# Altium PCB CH569W-R0-1v0.PcbDoc (part 4 of 4)
Units mil, origin at the board's own origin, x right, y up, seen from the top; angles counter-clockwise.
Board outline 3674 x 3156.46 mil, 4 copper layers (Top Layer, Mid-Layer 1, Mid-Layer 2, Bottom Layer); 78 components, 99 nets, 392 pads, 683 vias.
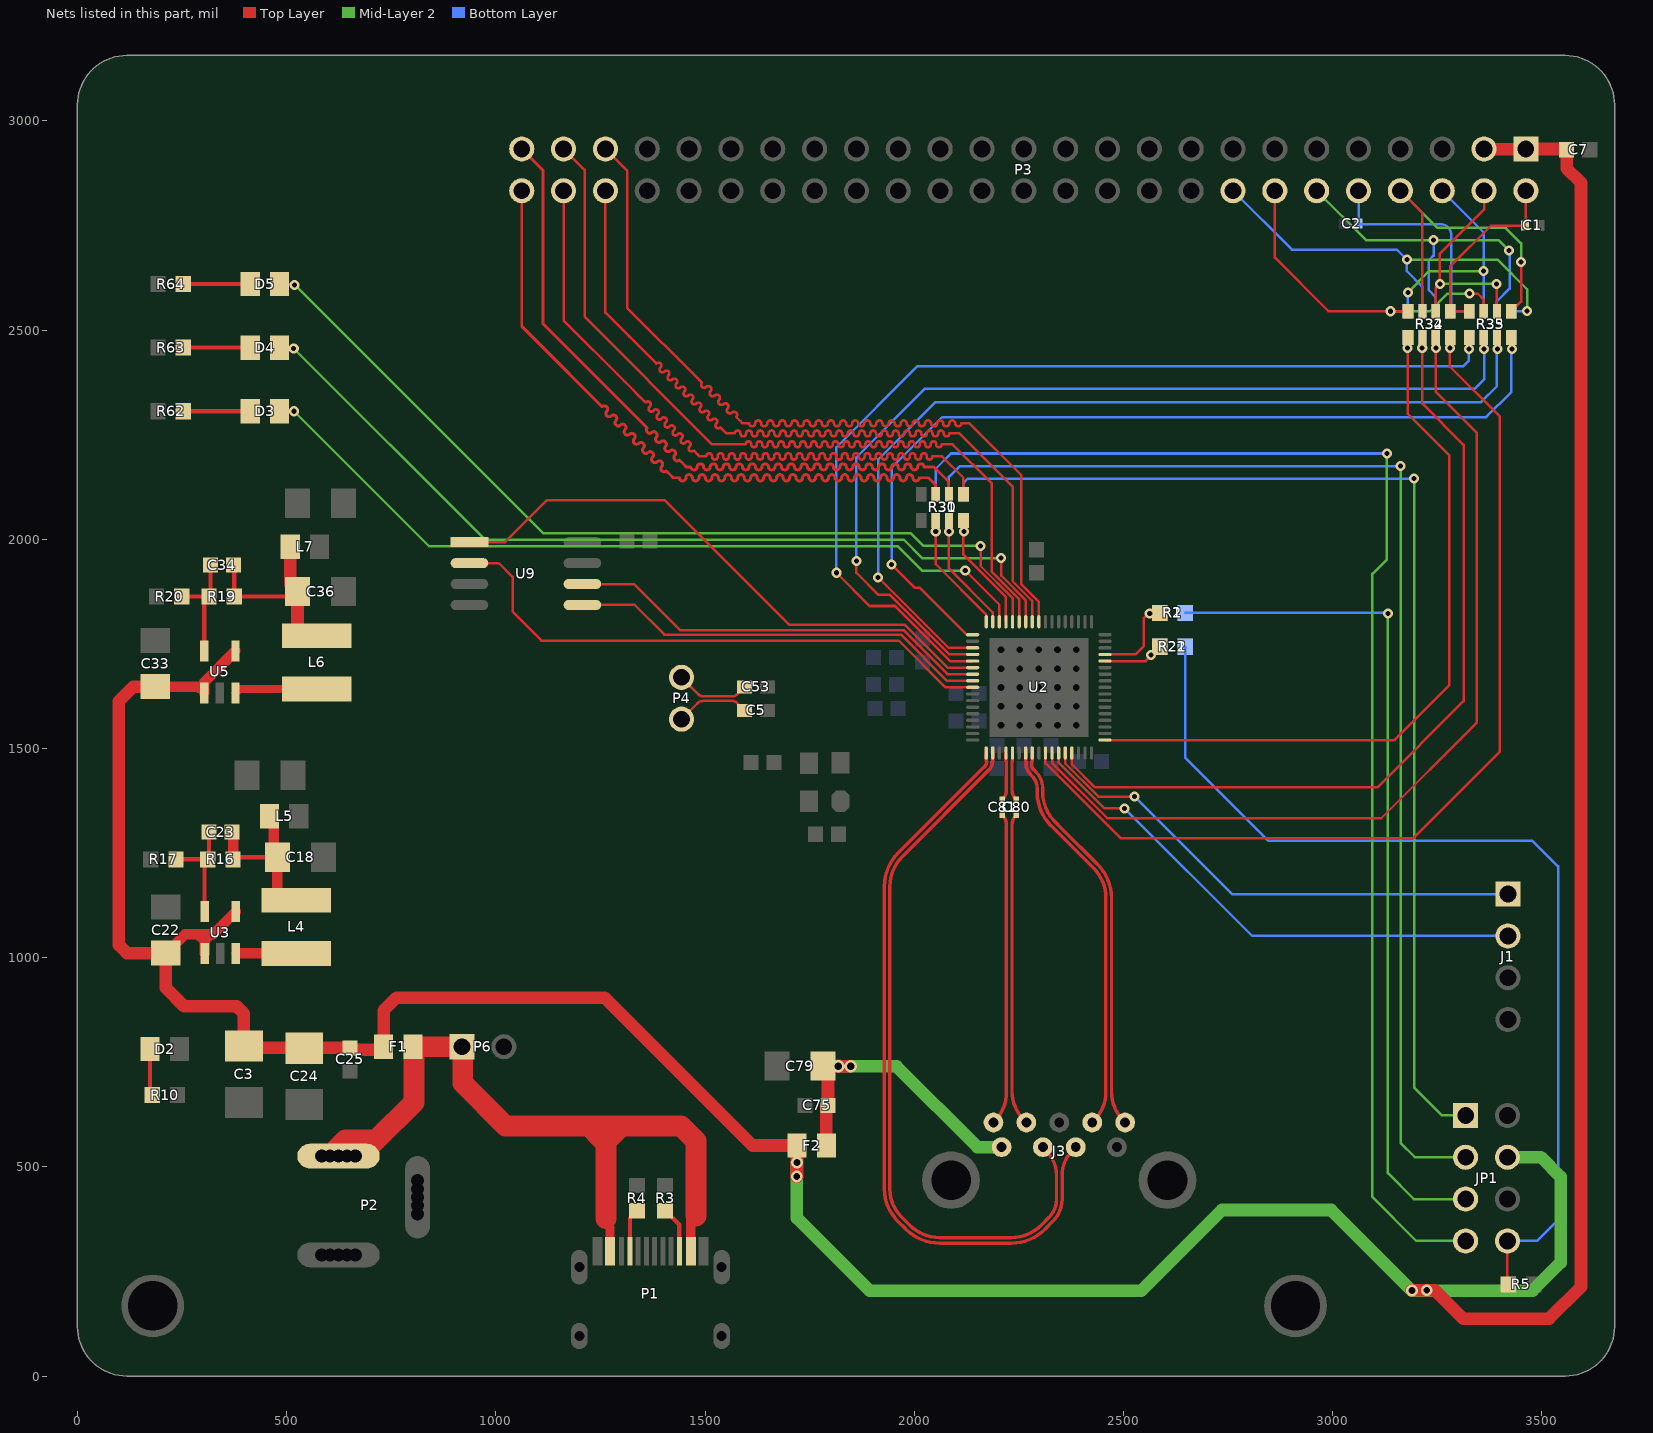
[diagram p6: the nets of this part, all layers, seen from the top]

## Via types
v1: diameter 17.72, hole 7.87, Top Layer to Bottom Layer, tented both sides, 350 vias
v2: diameter 28, hole 15, Top Layer to Bottom Layer, tented both sides, 141 vias
v3: diameter 28, hole 16, Top Layer to Bottom Layer, tented both sides, 104 vias
v4: diameter 24, hole 12, Top Layer to Bottom Layer, tented both sides, 85 vias
v5: diameter 30, hole 18, Top Layer to Bottom Layer, tented both sides, 3 vias

## Nets (pads, with @x,y where several pads share a name; then routed paths per layer and width w, separated by ;. In a path a pad name is that pad's centre, name@x,y a point inside that pad or via, vN(x,y) a via of type N, cw(c..) or ccw(c..) an arc to the next point about the centre after c; other vN are vias at no path point) (continued)
HD26: P3.45 U2.43 | length 2220.5
  Top Layer w6: P3.45@1262,2933 1314,2881 1314,2553 1486.5,2380.5 1492.6,2374.4 ccw(c1497.55,2369.45) 1492.6,2364.5 1492.95,2364.15 ccw(c1497.9,2369.1) 1502.85,2364.15 cw(c1507.8,2359.2) 1512.75,2364.15 1513.1,2363.8 cw(c1508.15,2358.85) 1513.1,2353.9 ccw(c1518.05,2348.95) 1513.1,2344 1513.46,2343.64 ccw(c1518.41,2348.59) 1523.36,2343.64 cw(c1528.3,2338.7) 1533.25,2343.64 1533.61,2343.29 cw(c1528.66,2338.34) 1533.61,2333.39 ccw(c1538.56,2328.44) 1533.61,2323.49 1533.96,2323.14 ccw(c1538.91,2328.09) 1543.86,2323.14 cw(c1548.81,2318.19) 1553.76,2323.14 1554.11,2322.79 cw(c1549.16,2317.84) 1554.11,2312.89 ccw(c1559.06,2307.94) 1554.11,2302.99 1554.47,2302.63 ccw(c1559.42,2307.58) 1564.37,2302.63 cw(c1569.32,2297.68) 1574.27,2302.63 1574.62,2302.28 cw(c1569.67,2297.33) 1574.62,2292.38 1584.87,2282.13 1590,2277 1590.75,2277 1605.25,2277 ccw(c1612.25,2277) 1612.25,2270 1612.75,2270 ccw(c1612.75,2277) 1619.75,2277 cw(c1626.75,2277) 1626.75,2284 1627.25,2284 cw(c1627.25,2277) 1634.25,2277 ccw(c1641.25,2277) 1641.25,2270 1641.75,2270 ccw(c1641.75,2277) 1648.75,2277 cw(c1655.75,2277) 1655.75,2284 1656.25,2284 cw(c1656.25,2277) 1663.25,2277 ccw(c1670.25,2277) 1670.25,2270 1670.75,2270 ccw(c1670.75,2277) 1677.75,2277 cw(c1684.75,2277) 1684.75,2284 1685.25,2284 cw(c1685.25,2277) 1692.25,2277 ccw(c1699.25,2277) 1699.25,2270 1699.75,2270 ccw(c1699.75,2277) 1706.75,2277 cw(c1713.75,2277) 1713.75,2284 1714.25,2284 cw(c1714.25,2277) 1721.25,2277 ccw(c1728.25,2277) 1728.25,2270 1728.75,2270 ccw(c1728.75,2277) 1735.75,2277 cw(c1742.75,2277) 1742.75,2284 1743.25,2284 cw(c1743.25,2277) 1750.25,2277 ccw(c1757.25,2277) 1757.25,2270 1757.75,2270 ccw(c1757.75,2277) 1764.75,2277 cw(c1771.75,2277) 1771.75,2284 1772.25,2284 cw(c1772.25,2277) 1779.25,2277 ccw(c1786.25,2277) 1786.25,2270 1786.75,2270 ccw(c1786.75,2277) 1793.75,2277 cw(c1800.75,2277) 1800.75,2284 1801.25,2284 cw(c1801.25,2277) 1808.25,2277 ccw(c1815.25,2277) 1815.25,2270 1815.75,2270 ccw(c1815.75,2277) 1822.75,2277 cw(c1829.75,2277) 1829.75,2284 1830.25,2284 cw(c1830.25,2277) 1837.25,2277 ccw(c1844.25,2277) 1844.25,2270 1844.75,2270 ccw(c1844.75,2277) 1851.75,2277 cw(c1858.75,2277) 1858.75,2284 1859.25,2284 cw(c1859.25,2277) 1866.25,2277 ccw(c1873.25,2277) 1873.25,2270 1873.75,2270 ccw(c1873.75,2277) 1880.75,2277 cw(c1887.75,2277) 1887.75,2284 1888.25,2284 cw(c1888.25,2277) 1895.25,2277 ccw(c1902.25,2277) 1902.25,2270 1902.75,2270 ccw(c1902.75,2277) 1909.75,2277 cw(c1916.75,2277) 1916.75,2284 1917.25,2284 cw(c1917.25,2277) 1924.25,2277 ccw(c1931.25,2277) 1931.25,2270 1931.75,2270 ccw(c1931.75,2277) 1938.75,2277 cw(c1945.75,2277) 1945.75,2284 1946.25,2284 cw(c1946.25,2277) 1953.25,2277 ccw(c1960.25,2277) 1960.25,2270 1960.75,2270 ccw(c1960.75,2277) 1967.75,2277 cw(c1974.75,2277) 1974.75,2284 1975.25,2284 cw(c1975.25,2277) 1982.25,2277 ccw(c1989.25,2277) 1989.25,2270 1989.75,2270 ccw(c1989.75,2277) 1996.75,2277 cw(c2003.75,2277) 2003.75,2284 2004.25,2284 cw(c2004.25,2277) 2011.25,2277 ccw(c2018.25,2277) 2018.25,2270 2018.75,2270 ccw(c2018.75,2277) 2025.75,2277 cw(c2032.75,2277) 2032.75,2284 2033.25,2284 cw(c2033.25,2277) 2040.25,2277 ccw(c2047.25,2277) 2047.25,2270 2047.75,2270 ccw(c2047.75,2277) 2054.75,2277 cw(c2061.75,2277) 2061.75,2284 2062.25,2284 cw(c2062.25,2277) 2069.25,2277 ccw(c2076.25,2277) 2076.25,2270 2076.75,2270 ccw(c2076.75,2277) 2083.75,2277 cw(c2090.75,2277) 2090.75,2284 2091.25,2284 cw(c2091.25,2277) 2098.25,2277 ccw(c2105.25,2277) 2105.25,2270 2105.75,2270 ccw(c2105.75,2277) 2112.75,2277 2120,2277 2132,2277 2256,2153 2256,1892.18 2298,1850.18 U2.43@2298,1802.78
HD27: P3.46 U2.44 | length 2222.2
  Top Layer w6: P3.46@1262,2833 1262,2542 1319.5,2484.5 1383.95,2420.05 1384.12,2420.23 cw(c1388.9,2415.46) 1393.67,2420.23 cw(c1388.9,2415.46) 1393.67,2410.68 1393.49,2410.51 1393.32,2410.33 ccw(c1398.09,2405.56) 1393.32,2400.79 ccw(c1398.09,2405.56) 1402.86,2400.79 1403.04,2400.96 1403.21,2401.14 cw(c1407.99,2396.37) 1412.76,2401.14 cw(c1407.99,2396.37) 1412.76,2391.59 1412.58,2391.42 1412.41,2391.24 ccw(c1417.18,2386.47) 1412.41,2381.69 ccw(c1417.18,2386.47) 1421.95,2381.69 1422.13,2381.87 1422.31,2382.05 cw(c1427.08,2377.27) 1431.85,2382.05 cw(c1427.08,2377.27) 1431.85,2372.5 1431.68,2372.32 1431.5,2372.15 ccw(c1436.27,2367.37) 1431.5,2362.6 ccw(c1436.27,2367.37) 1441.04,2362.6 1441.22,2362.78 1441.4,2362.96 cw(c1446.17,2358.18) 1450.94,2362.96 cw(c1446.17,2358.18) 1450.94,2353.41 1450.77,2353.23 1450.59,2353.06 ccw(c1455.36,2348.28) 1450.59,2343.51 ccw(c1455.36,2348.28) 1460.14,2343.51 1460.31,2343.69 1460.49,2343.86 cw(c1465.26,2339.09) 1470.04,2343.86 cw(c1465.26,2339.09) 1470.04,2334.32 1469.86,2334.14 1469.68,2333.96 ccw(c1474.46,2329.19) 1469.68,2324.42 ccw(c1474.46,2329.19) 1479.23,2324.42 1479.41,2324.59 1479.58,2324.77 cw(c1484.36,2320) 1489.13,2324.77 cw(c1484.36,2320) 1489.13,2315.23 1488.95,2315.05 1488.77,2314.87 ccw(c1493.55,2310.1) 1488.77,2305.33 ccw(c1493.55,2310.1) 1498.32,2305.33 1498.5,2305.5 1498.67,2305.68 cw(c1503.45,2300.91) 1508.22,2305.68 cw(c1503.45,2300.91) 1508.22,2296.13 1508.04,2295.96 1507.87,2295.78 ccw(c1512.64,2291.01) 1507.87,2286.23 ccw(c1512.64,2291.01) 1517.41,2286.23 1517.59,2286.41 1517.77,2286.59 cw(c1522.54,2281.81) 1527.31,2286.59 cw(c1522.54,2281.81) 1527.31,2277.04 1527.14,2276.86 1526.96,2276.69 ccw(c1531.73,2271.92) 1526.96,2267.14 ccw(c1531.73,2271.92) 1536.5,2267.14 1536.68,2267.32 1546.23,2257.77 1551,2253 1557.75,2253 1571.25,2253 1571.25,2253.25 cw(c1578,2253.25) 1578,2260 cw(c1578,2253.25) 1584.75,2253.25 1584.75,2253 1584.75,2252.75 ccw(c1591.5,2252.75) 1591.5,2246 ccw(c1591.5,2252.75) 1598.25,2252.75 1598.25,2253 1598.25,2253.25 cw(c1605,2253.25) 1605,2260 cw(c1605,2253.25) 1611.75,2253.25 1611.75,2253 1611.75,2252.75 ccw(c1618.5,2252.75) 1618.5,2246 ccw(c1618.5,2252.75) 1625.25,2252.75 1625.25,2253 1625.25,2253.25 cw(c1632,2253.25) 1632,2260 cw(c1632,2253.25) 1638.75,2253.25 1638.75,2253 1638.75,2252.75 ccw(c1645.5,2252.75) 1645.5,2246 ccw(c1645.5,2252.75) 1652.25,2252.75 1652.25,2253 1652.25,2253.25 cw(c1659,2253.25) 1659,2260 cw(c1659,2253.25) 1665.75,2253.25 1665.75,2253 1665.75,2252.75 ccw(c1672.5,2252.75) 1672.5,2246 ccw(c1672.5,2252.75) 1679.25,2252.75 1679.25,2253 1679.25,2253.25 cw(c1686,2253.25) 1686,2260 cw(c1686,2253.25) 1692.75,2253.25 1692.75,2253 1692.75,2252.75 ccw(c1699.5,2252.75) 1699.5,2246 ccw(c1699.5,2252.75) 1706.25,2252.75 1706.25,2253 1706.25,2253.25 cw(c1713,2253.25) 1713,2260 cw(c1713,2253.25) 1719.75,2253.25 1719.75,2253 1719.75,2252.75 ccw(c1726.5,2252.75) 1726.5,2246 ccw(c1726.5,2252.75) 1733.25,2252.75 1733.25,2253 1733.25,2253.25 cw(c1740,2253.25) 1740,2260 cw(c1740,2253.25) 1746.75,2253.25 1746.75,2253 1746.75,2252.75 ccw(c1753.5,2252.75) 1753.5,2246 ccw(c1753.5,2252.75) 1760.25,2252.75 1760.25,2253 1760.25,2253.25 cw(c1767,2253.25) 1767,2260 cw(c1767,2253.25) 1773.75,2253.25 1773.75,2253 1773.75,2252.75 ccw(c1780.5,2252.75) 1780.5,2246 ccw(c1780.5,2252.75) 1787.25,2252.75 1787.25,2253 1787.25,2253.25 cw(c1794,2253.25) 1794,2260 cw(c1794,2253.25) 1800.75,2253.25 1800.75,2253 1800.75,2252.75 ccw(c1807.5,2252.75) 1807.5,2246 ccw(c1807.5,2252.75) 1814.25,2252.75 1814.25,2253 1814.25,2253.25 cw(c1821,2253.25) 1821,2260 cw(c1821,2253.25) 1827.75,2253.25 1827.75,2253 1827.75,2252.75 ccw(c1834.5,2252.75) 1834.5,2246 ccw(c1834.5,2252.75) 1841.25,2252.75 1841.25,2253 1841.25,2253.25 cw(c1848,2253.25) 1848,2260 cw(c1848,2253.25) 1854.75,2253.25 1854.75,2253 1854.75,2252.75 ccw(c1861.5,2252.75) 1861.5,2246 ccw(c1861.5,2252.75) 1868.25,2252.75 1868.25,2253 1868.25,2253.25 cw(c1875,2253.25) 1875,2260 cw(c1875,2253.25) 1881.75,2253.25 1881.75,2253 1881.75,2252.75 ccw(c1888.5,2252.75) 1888.5,2246 ccw(c1888.5,2252.75) 1895.25,2252.75 1895.25,2253 1895.25,2253.25 cw(c1902,2253.25) 1902,2260 cw(c1902,2253.25) 1908.75,2253.25 1908.75,2253 1908.75,2252.75 ccw(c1915.5,2252.75) 1915.5,2246 ccw(c1915.5,2252.75) 1922.25,2252.75 1922.25,2253 1922.25,2253.25 cw(c1929,2253.25) 1929,2260 cw(c1929,2253.25) 1935.75,2253.25 1935.75,2253 1935.75,2252.75 ccw(c1942.5,2252.75) 1942.5,2246 ccw(c1942.5,2252.75) 1949.25,2252.75 1949.25,2253 1949.25,2253.25 cw(c1956,2253.25) 1956,2260 cw(c1956,2253.25) 1962.75,2253.25 1962.75,2253 1962.75,2252.75 ccw(c1969.5,2252.75) 1969.5,2246 ccw(c1969.5,2252.75) 1976.25,2252.75 1976.25,2253 1976.25,2253.25 cw(c1983,2253.25) 1983,2260 cw(c1983,2253.25) 1989.75,2253.25 1989.75,2253 1989.75,2252.75 ccw(c1996.5,2252.75) 1996.5,2246 ccw(c1996.5,2252.75) 2003.25,2252.75 2003.25,2253 2003.25,2253.25 cw(c2010,2253.25) 2010,2260 cw(c2010,2253.25) 2016.75,2253.25 2016.75,2253 2016.75,2252.75 ccw(c2023.5,2252.75) 2023.5,2246 ccw(c2023.5,2252.75) 2030.25,2252.75 2030.25,2253 2030.25,2253.25 cw(c2037,2253.25) 2037,2260 cw(c2037,2253.25) 2043.75,2253.25 2043.75,2253 2043.75,2252.75 ccw(c2050.5,2252.75) 2050.5,2246 ccw(c2050.5,2252.75) 2057.25,2252.75 2057.25,2253 2057.25,2253.25 cw(c2064,2253.25) 2064,2260 cw(c2064,2253.25) 2070.75,2253.25 2070.75,2253 2070.75,2252.75 ccw(c2077.5,2252.75) 2077.5,2246 ccw(c2077.5,2252.75) 2084.25,2252.75 2084.25,2253 2091,2253 2108,2253 2235,2126 2235,1899.74 2282.25,1852.49 U2.44@2282.25,1802.78
HD28: P3.47 U2.46 | length 2221.2
  Top Layer w6: P3.47@1162,2933 1212,2883 1212,2532 1517,2227 1557,2227 1597.5,2227 1597.5,2227.5 cw(c1604,2227.5) 1604,2234 cw(c1604,2227.5) 1610.5,2227.5 1610.5,2227 1610.5,2226.5 ccw(c1617,2226.5) 1617,2220 ccw(c1617,2226.5) 1623.5,2226.5 1623.5,2227 1623.5,2227.5 cw(c1630,2227.5) 1630,2234 cw(c1630,2227.5) 1636.5,2227.5 1636.5,2227 1636.5,2226.5 ccw(c1643,2226.5) 1643,2220 ccw(c1643,2226.5) 1649.5,2226.5 1649.5,2227 1649.5,2227.5 cw(c1656,2227.5) 1656,2234 cw(c1656,2227.5) 1662.5,2227.5 1662.5,2227 1662.5,2226.5 ccw(c1669,2226.5) 1669,2220 ccw(c1669,2226.5) 1675.5,2226.5 1675.5,2227 1675.5,2227.5 cw(c1682,2227.5) 1682,2234 cw(c1682,2227.5) 1688.5,2227.5 1688.5,2227 1688.5,2226.5 ccw(c1695,2226.5) 1695,2220 ccw(c1695,2226.5) 1701.5,2226.5 1701.5,2227 1701.5,2227.5 cw(c1708,2227.5) 1708,2234 cw(c1708,2227.5) 1714.5,2227.5 1714.5,2227 1714.5,2226.5 ccw(c1721,2226.5) 1721,2220 ccw(c1721,2226.5) 1727.5,2226.5 1727.5,2227 1727.5,2227.5 cw(c1734,2227.5) 1734,2234 cw(c1734,2227.5) 1740.5,2227.5 1740.5,2227 1740.5,2226.5 ccw(c1747,2226.5) 1747,2220 ccw(c1747,2226.5) 1753.5,2226.5 1753.5,2227 1753.5,2227.5 cw(c1760,2227.5) 1760,2234 cw(c1760,2227.5) 1766.5,2227.5 1766.5,2227 1766.5,2226.5 ccw(c1773,2226.5) 1773,2220 ccw(c1773,2226.5) 1779.5,2226.5 1779.5,2227 1779.5,2227.5 cw(c1786,2227.5) 1786,2234 cw(c1786,2227.5) 1792.5,2227.5 1792.5,2227 1792.5,2226.5 ccw(c1799,2226.5) 1799,2220 ccw(c1799,2226.5) 1805.5,2226.5 1805.5,2227 1805.5,2227.5 cw(c1812,2227.5) 1812,2234 cw(c1812,2227.5) 1818.5,2227.5 1818.5,2227 1818.5,2226.5 ccw(c1825,2226.5) 1825,2220 ccw(c1825,2226.5) 1831.5,2226.5 1831.5,2227 1831.5,2227.5 cw(c1838,2227.5) 1838,2234 cw(c1838,2227.5) 1844.5,2227.5 1844.5,2227 1844.5,2226.5 ccw(c1851,2226.5) 1851,2220 ccw(c1851,2226.5) 1857.5,2226.5 1857.5,2227 1857.5,2227.5 cw(c1864,2227.5) 1864,2234 cw(c1864,2227.5) 1870.5,2227.5 1870.5,2227 1870.5,2226.5 ccw(c1877,2226.5) 1877,2220 ccw(c1877,2226.5) 1883.5,2226.5 1883.5,2227 1883.5,2227.5 cw(c1890,2227.5) 1890,2234 cw(c1890,2227.5) 1896.5,2227.5 1896.5,2227 1896.5,2226.5 ccw(c1903,2226.5) 1903,2220 ccw(c1903,2226.5) 1909.5,2226.5 1909.5,2227 1909.5,2227.5 cw(c1916,2227.5) 1916,2234 cw(c1916,2227.5) 1922.5,2227.5 1922.5,2227 1922.5,2226.5 ccw(c1929,2226.5) 1929,2220 ccw(c1929,2226.5) 1935.5,2226.5 1935.5,2227 1935.5,2227.5 cw(c1942,2227.5) 1942,2234 cw(c1942,2227.5) 1948.5,2227.5 1948.5,2227 1948.5,2226.5 ccw(c1955,2226.5) 1955,2220 ccw(c1955,2226.5) 1961.5,2226.5 1961.5,2227 1961.5,2227.5 cw(c1968,2227.5) 1968,2234 cw(c1968,2227.5) 1974.5,2227.5 1974.5,2227 1974.5,2226.5 ccw(c1981,2226.5) 1981,2220 ccw(c1981,2226.5) 1987.5,2226.5 1987.5,2227 1987.5,2227.5 cw(c1994,2227.5) 1994,2234 cw(c1994,2227.5) 2000.5,2227.5 2000.5,2227 2000.5,2226.5 ccw(c2007,2226.5) 2007,2220 ccw(c2007,2226.5) 2013.5,2226.5 2013.5,2227 2013.5,2227.5 cw(c2020,2227.5) 2020,2234 cw(c2020,2227.5) 2026.5,2227.5 2026.5,2227 2026.5,2226.5 ccw(c2033,2226.5) 2033,2220 ccw(c2033,2226.5) 2039.5,2226.5 2039.5,2227 2039.5,2227.5 cw(c2046,2227.5) 2046,2234 cw(c2046,2227.5) 2052.5,2227.5 2052.5,2227 2052.5,2226.5 ccw(c2059,2226.5) 2059,2220 ccw(c2059,2226.5) 2065.5,2226.5 2065.5,2227 2072,2227 2092,2227 2185,2134 2185,1922.87 2250.76,1857.11 U2.46@2250.76,1802.78
HD29: P3.48 R31.1 | length 1938.3
  Top Layer w6: P3.48@1162,2833 1162,2523 1307,2378 1357.6,2327.4 ccw(c1358.13,2327.93) 1358.66,2327.4 cw(c1363.43,2322.63) 1368.21,2327.4 cw(c1363.43,2322.63) 1368.21,2317.85 1367.68,2317.32 1367.15,2316.79 ccw(c1371.92,2312.02) 1367.15,2307.25 ccw(c1371.92,2312.02) 1376.69,2307.25 1377.22,2307.78 1377.75,2308.31 cw(c1382.53,2303.54) 1387.3,2308.31 cw(c1382.53,2303.54) 1387.3,2298.76 1386.77,2298.23 1386.24,2297.7 ccw(c1391.01,2292.93) 1386.24,2288.16 ccw(c1391.01,2292.93) 1395.78,2288.16 1396.31,2288.69 1396.84,2289.22 cw(c1401.62,2284.44) 1406.39,2289.22 cw(c1401.62,2284.44) 1406.39,2279.67 1405.86,2279.14 1405.33,2278.61 ccw(c1410.1,2273.84) 1405.33,2269.06 ccw(c1410.1,2273.84) 1414.88,2269.06 1415.41,2269.59 1415.94,2270.12 cw(c1420.71,2265.35) 1425.48,2270.12 cw(c1420.71,2265.35) 1425.48,2260.58 1424.95,2260.05 1424.42,2259.52 ccw(c1429.19,2254.75) 1424.42,2249.97 ccw(c1429.19,2254.75) 1433.97,2249.97 1434.5,2250.5 1435.03,2251.03 cw(c1439.8,2246.26) 1444.57,2251.03 cw(c1439.8,2246.26) 1444.57,2241.49 1444.04,2240.96 1443.51,2240.43 ccw(c1448.29,2235.65) 1443.51,2230.88 ccw(c1448.29,2235.65) 1453.06,2230.88 1453.59,2231.41 1454.12,2231.94 cw(c1458.89,2227.17) 1463.67,2231.94 cw(c1458.89,2227.17) 1463.67,2222.4 1463.14,2221.86 1462.6,2221.33 ccw(c1467.38,2216.56) 1462.6,2211.79 ccw(c1467.38,2216.56) 1472.15,2211.79 cw(c1472.68,2211.26) 1473.21,2211.79 1482.23,2202.77 1487,2198 1489.75,2198 1502.5,2198 ccw(c1502.5,2198.75) 1503.25,2198.75 cw(c1510,2198.75) 1510,2205.5 cw(c1510,2198.75) 1516.75,2198.75 1516.75,2198 1516.75,2197.25 ccw(c1523.5,2197.25) 1523.5,2190.5 ccw(c1523.5,2197.25) 1530.25,2197.25 1530.25,2198 1530.25,2198.75 cw(c1537,2198.75) 1537,2205.5 cw(c1537,2198.75) 1543.75,2198.75 1543.75,2198 1543.75,2197.25 ccw(c1550.5,2197.25) 1550.5,2190.5 ccw(c1550.5,2197.25) 1557.25,2197.25 1557.25,2198 1557.25,2198.75 cw(c1564,2198.75) 1564,2205.5 cw(c1564,2198.75) 1570.75,2198.75 1570.75,2198 1570.75,2197.25 ccw(c1577.5,2197.25) 1577.5,2190.5 ccw(c1577.5,2197.25) 1584.25,2197.25 1584.25,2198 1584.25,2198.75 cw(c1591,2198.75) 1591,2205.5 cw(c1591,2198.75) 1597.75,2198.75 1597.75,2198 1597.75,2197.25 ccw(c1604.5,2197.25) 1604.5,2190.5 ccw(c1604.5,2197.25) 1611.25,2197.25 1611.25,2198 1611.25,2198.75 cw(c1618,2198.75) 1618,2205.5 cw(c1618,2198.75) 1624.75,2198.75 1624.75,2198 1624.75,2197.25 ccw(c1631.5,2197.25) 1631.5,2190.5 ccw(c1631.5,2197.25) 1638.25,2197.25 1638.25,2198 1638.25,2198.75 cw(c1645,2198.75) 1645,2205.5 cw(c1645,2198.75) 1651.75,2198.75 1651.75,2198 1651.75,2197.25 ccw(c1658.5,2197.25) 1658.5,2190.5 ccw(c1658.5,2197.25) 1665.25,2197.25 1665.25,2198 1665.25,2198.75 cw(c1672,2198.75) 1672,2205.5 cw(c1672,2198.75) 1678.75,2198.75 1678.75,2198 1678.75,2197.25 ccw(c1685.5,2197.25) 1685.5,2190.5 ccw(c1685.5,2197.25) 1692.25,2197.25 1692.25,2198 1692.25,2198.75 cw(c1699,2198.75) 1699,2205.5 cw(c1699,2198.75) 1705.75,2198.75 1705.75,2198 1705.75,2197.25 ccw(c1712.5,2197.25) 1712.5,2190.5 ccw(c1712.5,2197.25) 1719.25,2197.25 1719.25,2198 1719.25,2198.75 cw(c1726,2198.75) 1726,2205.5 cw(c1726,2198.75) 1732.75,2198.75 1732.75,2198 1732.75,2197.25 ccw(c1739.5,2197.25) 1739.5,2190.5 ccw(c1739.5,2197.25) 1746.25,2197.25 1746.25,2198 1746.25,2198.75 cw(c1753,2198.75) 1753,2205.5 cw(c1753,2198.75) 1759.75,2198.75 1759.75,2198 1759.75,2197.25 ccw(c1766.5,2197.25) 1766.5,2190.5 ccw(c1766.5,2197.25) 1773.25,2197.25 1773.25,2198 1773.25,2198.75 cw(c1780,2198.75) 1780,2205.5 cw(c1780,2198.75) 1786.75,2198.75 1786.75,2198 1786.75,2197.25 ccw(c1793.5,2197.25) 1793.5,2190.5 ccw(c1793.5,2197.25) 1800.25,2197.25 1800.25,2198 1800.25,2198.75 cw(c1807,2198.75) 1807,2205.5 cw(c1807,2198.75) 1813.75,2198.75 1813.75,2198 1813.75,2197.25 ccw(c1820.5,2197.25) 1820.5,2190.5 ccw(c1820.5,2197.25) 1827.25,2197.25 1827.25,2198 1827.25,2198.75 cw(c1834,2198.75) 1834,2205.5 cw(c1834,2198.75) 1840.75,2198.75 1840.75,2198 1840.75,2197.25 ccw(c1847.5,2197.25) 1847.5,2190.5 ccw(c1847.5,2197.25) 1854.25,2197.25 1854.25,2198 1854.25,2198.75 cw(c1861,2198.75) 1861,2205.5 cw(c1861,2198.75) 1867.75,2198.75 1867.75,2198 1867.75,2197.25 ccw(c1874.5,2197.25) 1874.5,2190.5 ccw(c1874.5,2197.25) 1881.25,2197.25 1881.25,2198 1881.25,2198.75 cw(c1888,2198.75) 1888,2205.5 cw(c1888,2198.75) 1894.75,2198.75 1894.75,2198 1894.75,2197.25 ccw(c1901.5,2197.25) 1901.5,2190.5 ccw(c1901.5,2197.25) 1908.25,2197.25 1908.25,2198 1908.25,2198.75 cw(c1915,2198.75) 1915,2205.5 cw(c1915,2198.75) 1921.75,2198.75 1921.75,2198 1921.75,2197.25 ccw(c1928.5,2197.25) 1928.5,2190.5 ccw(c1928.5,2197.25) 1935.25,2197.25 1935.25,2198 1935.25,2198.75 cw(c1942,2198.75) 1942,2205.5 cw(c1942,2198.75) 1948.75,2198.75 1948.75,2198 1948.75,2197.25 ccw(c1955.5,2197.25) 1955.5,2190.5 ccw(c1955.5,2197.25) 1962.25,2197.25 1962.25,2198 1962.25,2198.75 cw(c1969,2198.75) 1969,2205.5 cw(c1969,2198.75) 1975.75,2198.75 1975.75,2198 1975.75,2197.25 ccw(c1982.5,2197.25) 1982.5,2190.5 ccw(c1982.5,2197.25) 1989.25,2197.25 1989.25,2198 1989.25,2198.75 cw(c1996,2198.75) 1996,2205.5 cw(c1996,2198.75) 2002.75,2198.75 2002.75,2198 2002.75,2197.25 ccw(c2009.5,2197.25) 2009.5,2190.5 ccw(c2009.5,2197.25) 2016.25,2197.25 2016.25,2198 2016.25,2198.75 cw(c2023,2198.75) 2023,2205.5 cw(c2023,2198.75) 2029.75,2198.75 2029.75,2198 2029.75,2197.25 ccw(c2036.5,2197.25) 2036.5,2190.5 ccw(c2036.5,2197.25) 2043.25,2197.25 cw(c2044,2197.25) 2044,2198 2050,2198 2066.65,2198 2117.65,2147 R31.1@2117.65,2107.5
HD30: P3.49 R31.2 | length 1938.8
  Top Layer w6: R31.2@2083,2107.5 2083,2137
  Top Layer w7: P3.49@1062,2933 1113,2882 1113,2515 1282.5,2345.5 1361.84,2266.16 ccw(c1366.79,2261.21) 1361.84,2256.26 1362.9,2255.2 ccw(c1367.85,2260.15) 1372.8,2255.2 cw(c1377.75,2250.25) 1382.7,2255.2 1383.76,2254.14 cw(c1378.81,2249.19) 1383.76,2244.24 ccw(c1388.71,2239.29) 1383.76,2234.34 1384.82,2233.28 ccw(c1389.77,2238.23) 1394.72,2233.28 cw(c1399.67,2228.33) 1404.62,2233.28 1405.68,2232.22 cw(c1400.73,2227.27) 1405.68,2222.32 ccw(c1410.63,2217.37) 1405.68,2212.42 1406.74,2211.36 ccw(c1411.69,2216.31) 1416.64,2211.36 cw(c1421.59,2206.41) 1426.54,2211.36 1427.6,2210.3 cw(c1422.65,2205.35) 1427.6,2200.4 ccw(c1432.55,2195.45) 1427.6,2190.5 1428.66,2189.44 ccw(c1433.61,2194.39) 1438.56,2189.44 1449.52,2178.48 1455,2173 1465.75,2173 ccw(c1472.75,2173) 1472.75,2166 1474.25,2166 ccw(c1474.25,2173) 1481.25,2173 cw(c1488.25,2173) 1488.25,2180 1489.75,2180 cw(c1489.75,2173) 1496.75,2173 ccw(c1503.75,2173) 1503.75,2166 1505.25,2166 ccw(c1505.25,2173) 1512.25,2173 cw(c1519.25,2173) 1519.25,2180 1520.75,2180 cw(c1520.75,2173) 1527.75,2173 ccw(c1534.75,2173) 1534.75,2166 1536.25,2166 ccw(c1536.25,2173) 1543.25,2173 cw(c1550.25,2173) 1550.25,2180 1551.75,2180 cw(c1551.75,2173) 1558.75,2173 ccw(c1565.75,2173) 1565.75,2166 1567.25,2166 ccw(c1567.25,2173) 1574.25,2173 cw(c1581.25,2173) 1581.25,2180 1582.75,2180 cw(c1582.75,2173) 1589.75,2173 ccw(c1596.75,2173) 1596.75,2166 1598.25,2166 ccw(c1598.25,2173) 1605.25,2173 cw(c1612.25,2173) 1612.25,2180 1613.75,2180 cw(c1613.75,2173) 1620.75,2173 ccw(c1627.75,2173) 1627.75,2166 1629.25,2166 ccw(c1629.25,2173) 1636.25,2173 cw(c1643.25,2173) 1643.25,2180 1644.75,2180 cw(c1644.75,2173) 1651.75,2173 ccw(c1658.75,2173) 1658.75,2166 1660.25,2166 ccw(c1660.25,2173) 1667.25,2173 cw(c1674.25,2173) 1674.25,2180 1675.75,2180 cw(c1675.75,2173) 1682.75,2173 ccw(c1689.75,2173) 1689.75,2166 1691.25,2166 ccw(c1691.25,2173) 1698.25,2173 cw(c1705.25,2173) 1705.25,2180 1706.75,2180 cw(c1706.75,2173) 1713.75,2173 ccw(c1720.75,2173) 1720.75,2166 1722.25,2166 ccw(c1722.25,2173) 1729.25,2173 cw(c1736.25,2173) 1736.25,2180 1737.75,2180 cw(c1737.75,2173) 1744.75,2173 ccw(c1751.75,2173) 1751.75,2166 1753.25,2166 ccw(c1753.25,2173) 1760.25,2173 cw(c1767.25,2173) 1767.25,2180 1768.75,2180 cw(c1768.75,2173) 1775.75,2173 ccw(c1782.75,2173) 1782.75,2166 1784.25,2166 ccw(c1784.25,2173) 1791.25,2173 cw(c1798.25,2173) 1798.25,2180 1799.75,2180 cw(c1799.75,2173) 1806.75,2173 ccw(c1813.75,2173) 1813.75,2166 1815.25,2166 ccw(c1815.25,2173) 1822.25,2173 cw(c1829.25,2173) 1829.25,2180 1830.75,2180 cw(c1830.75,2173) 1837.75,2173 ccw(c1844.75,2173) 1844.75,2166 1846.25,2166 ccw(c1846.25,2173) 1853.25,2173 cw(c1860.25,2173) 1860.25,2180 1861.75,2180 cw(c1861.75,2173) 1868.75,2173 ccw(c1875.75,2173) 1875.75,2166 1877.25,2166 ccw(c1877.25,2173) 1884.25,2173 cw(c1891.25,2173) 1891.25,2180 1892.75,2180 cw(c1892.75,2173) 1899.75,2173 ccw(c1906.75,2173) 1906.75,2166 1908.25,2166 ccw(c1908.25,2173) 1915.25,2173 cw(c1922.25,2173) 1922.25,2180 1923.75,2180 cw(c1923.75,2173) 1930.75,2173 ccw(c1937.75,2173) 1937.75,2166 1939.25,2166 ccw(c1939.25,2173) 1946.25,2173 cw(c1953.25,2173) 1953.25,2180 1954.75,2180 cw(c1954.75,2173) 1961.75,2173 ccw(c1968.75,2173) 1968.75,2166 1970.25,2166 ccw(c1970.25,2173) 1977.25,2173 cw(c1984.25,2173) 1984.25,2180 1985.75,2180 cw(c1985.75,2173) 1992.75,2173 ccw(c1999.75,2173) 1999.75,2166 2001.25,2166 ccw(c2001.25,2173) 2008.25,2173 cw(c2015.25,2173) 2015.25,2180 2016.75,2180 cw(c2016.75,2173) 2023.75,2173 2039.25,2173 2047,2173 2083,2137
HD31: P3.50 R31.3 | length 1929.4
  Top Layer w7: P3.50@1062,2833 1062,2509 1099,2472 1254.12,2316.88 cw(c1259.42,2311.58) 1264.72,2316.88 1265.08,2316.53 cw(c1259.77,2311.23) 1265.08,2305.92 ccw(c1270.38,2300.62) 1265.08,2295.32 1265.43,2294.96 ccw(c1270.73,2300.27) 1276.04,2294.96 cw(c1281.34,2289.66) 1286.64,2294.96 1287,2294.61 cw(c1281.69,2289.31) 1287,2284 ccw(c1292.3,2278.7) 1287,2273.4 1287.35,2273.04 ccw(c1292.65,2278.35) 1297.96,2273.04 cw(c1303.26,2267.74) 1308.56,2273.04 1308.92,2272.69 cw(c1303.62,2267.38) 1308.92,2262.08 ccw(c1314.22,2256.78) 1308.92,2251.47 ; 1308.92,2251.47 1309.27,2251.12 ccw(c1314.58,2256.42) 1319.88,2251.12 cw(c1325.18,2245.82) 1330.49,2251.12 1330.84,2250.77 cw(c1325.54,2245.46) 1330.84,2240.16 ccw(c1336.14,2234.86) 1330.84,2229.55 1331.19,2229.2 ccw(c1336.5,2234.5) 1341.8,2229.2 cw(c1347.1,2223.9) 1352.41,2229.2 1352.76,2228.85 cw(c1347.46,2223.54) 1352.76,2218.24 ccw(c1358.06,2212.94) 1352.76,2207.63 1353.11,2207.28 ccw(c1358.42,2212.58) 1363.72,2207.28 cw(c1369.02,2201.98) 1374.33,2207.28 1374.68,2206.93 cw(c1369.38,2201.62) 1374.68,2196.32 ccw(c1379.98,2191.02) 1374.68,2185.71 1375.03,2185.36 ccw(c1380.34,2190.66) 1385.64,2185.36 cw(c1390.94,2180.06) 1396.25,2185.36 1396.6,2185.01 cw(c1391.3,2179.7) 1396.6,2174.4 ccw(c1401.9,2169.1) 1396.6,2163.79 1396.95,2163.44 ccw(c1402.26,2168.74) 1407.56,2163.44 1418.52,2152.48 1424,2147 1438.75,2147 ccw(c1446.25,2147) 1446.25,2139.5 1446.75,2139.5 ccw(c1446.75,2147) 1454.25,2147 cw(c1461.75,2147) 1461.75,2154.5 1462.25,2154.5 cw(c1462.25,2147) 1469.75,2147 ccw(c1477.25,2147) 1477.25,2139.5 1477.75,2139.5 ccw(c1477.75,2147) 1485.25,2147 cw(c1492.75,2147) 1492.75,2154.5 1493.25,2154.5 cw(c1493.25,2147) 1500.75,2147 ccw(c1508.25,2147) 1508.25,2139.5 1508.75,2139.5 ccw(c1508.75,2147) 1516.25,2147 cw(c1523.75,2147) 1523.75,2154.5 1524.25,2154.5 cw(c1524.25,2147) 1531.75,2147 ccw(c1539.25,2147) 1539.25,2139.5 1539.75,2139.5 ccw(c1539.75,2147) 1547.25,2147 cw(c1554.75,2147) 1554.75,2154.5 1555.25,2154.5 cw(c1555.25,2147) 1562.75,2147 ccw(c1570.25,2147) 1570.25,2139.5 1570.75,2139.5 ccw(c1570.75,2147) 1578.25,2147 cw(c1585.75,2147) 1585.75,2154.5 1586.25,2154.5 cw(c1586.25,2147) 1593.75,2147 ccw(c1601.25,2147) 1601.25,2139.5 1601.75,2139.5 ccw(c1601.75,2147) 1609.25,2147 cw(c1616.75,2147) 1616.75,2154.5 1617.25,2154.5 cw(c1617.25,2147) 1624.75,2147 ccw(c1632.25,2147) 1632.25,2139.5 1632.75,2139.5 ccw(c1632.75,2147) 1640.25,2147 cw(c1647.75,2147) 1647.75,2154.5 1648.25,2154.5 cw(c1648.25,2147) 1655.75,2147 ccw(c1663.25,2147) 1663.25,2139.5 1663.75,2139.5 ccw(c1663.75,2147) 1671.25,2147 cw(c1678.75,2147) 1678.75,2154.5 1679.25,2154.5 cw(c1679.25,2147) 1686.75,2147 ccw(c1694.25,2147) 1694.25,2139.5 1694.75,2139.5 ccw(c1694.75,2147) 1702.25,2147 cw(c1709.75,2147) 1709.75,2154.5 1710.25,2154.5 cw(c1710.25,2147) 1717.75,2147 ccw(c1725.25,2147) 1725.25,2139.5 1725.75,2139.5 ccw(c1725.75,2147) 1733.25,2147 cw(c1740.75,2147) 1740.75,2154.5 1741.25,2154.5 cw(c1741.25,2147) 1748.75,2147 ccw(c1756.25,2147) 1756.25,2139.5 1756.75,2139.5 ccw(c1756.75,2147) 1764.25,2147 cw(c1771.75,2147) 1771.75,2154.5 1772.25,2154.5 cw(c1772.25,2147) 1779.75,2147 ccw(c1787.25,2147) 1787.25,2139.5 1787.75,2139.5 ccw(c1787.75,2147) 1795.25,2147 cw(c1802.75,2147) 1802.75,2154.5 1803.25,2154.5 cw(c1803.25,2147) 1810.75,2147 ccw(c1818.25,2147) 1818.25,2139.5 1818.75,2139.5 ccw(c1818.75,2147) 1826.25,2147 cw(c1833.75,2147) 1833.75,2154.5 1834.25,2154.5 cw(c1834.25,2147) 1841.75,2147 ccw(c1849.25,2147) 1849.25,2139.5 1849.75,2139.5 ccw(c1849.75,2147) 1857.25,2147 cw(c1864.75,2147) 1864.75,2154.5 1865.25,2154.5 cw(c1865.25,2147) 1872.75,2147 ccw(c1880.25,2147) 1880.25,2139.5 1880.75,2139.5 ccw(c1880.75,2147) 1888.25,2147 cw(c1895.75,2147) 1895.75,2154.5 1896.25,2154.5 cw(c1896.25,2147) 1903.75,2147 ccw(c1911.25,2147) 1911.25,2139.5 1911.75,2139.5 ccw(c1911.75,2147) 1919.25,2147 cw(c1926.75,2147) 1926.75,2154.5 1927.25,2154.5 cw(c1927.25,2147) 1934.75,2147 ccw(c1942.25,2147) 1942.25,2139.5 1942.75,2139.5 ccw(c1942.75,2147) 1950.25,2147 cw(c1957.75,2147) 1957.75,2154.5 1958.25,2154.5 cw(c1958.25,2147) 1965.75,2147 ccw(c1973.25,2147) 1973.25,2139.5 1973.75,2139.5 ccw(c1973.75,2147) 1981.25,2147 cw(c1988.75,2147) 1988.75,2154.5 1989.25,2154.5 cw(c1989.25,2147) 1996.75,2147 ccw(c2004.25,2147) 2004.25,2139.5 2004.75,2139.5 ccw(c2004.75,2147) 2012.25,2147 2020,2147 2034,2147 2051.5,2129.5 R31.3@2051.5,2107.5
HRACK: R32.7 R34.2 U2.11 | length 2124.7
  Top Layer w6: U2.11@2329.5,1489.22 2329.5,1465.5 2461.75,1333.25 3116.25,1333.25 3344.75,1561.75 3344.75,2254.25 3246.94,2352.06 v4(3246.94,2457.5)
HRACK1: P3.12 R33.3 R34.7 | length 855
  Mid-Layer 2 w6: P3.12@2962,2833 3080,2715 v4(3241.36,2715) 3396.3,2715 v4(3421.21,2690.09)
  Bottom Layer w6: v4(3241.36,2715) 3241.36,2677.92 3230.36,2666.92 3230.36,2595.28 3246.35,2579.28 R34.7@3246.35,2544.99 ; R33.3@3392.68,2544.99 3392.68,2568.91 3422.88,2599.11 v4@3422.88,2687.87
HRCLK: R32.8 R34.1 U2.10 | length 2285
  Top Layer w6: U2.10@2313.75,1489.22 2313.75,1465.25 2494,1285 3192,1285 3400,1493 3400,2293 3280.61,2412.39 v4(3280.61,2457.5)
HRCLK1: C2.2 P3.10 R33.1 R34.8 | length 541.6
  Bottom Layer w6: C2.2@3061.36,2753.38 C2.2@3062,2753.38 ; P3.10@3062,2833 C2.2@3062,2753.38 ; R33.1@3326.54,2544.99 3284.13,2544.99 3284.13,2726.28 ccw(c3257.04,2726.28) 3257.04,2753.38 C2.2@3062,2753.38
HRVLD: R32.6 R34.3 U2.14 | length 1981.3
  Top Layer w6: U2.14@2376.74,1489.22 2376.74,1462.26 2432,1407 3107,1407 3313.25,1613.25 3313.25,2225.75 3214.86,2324.14 R32.6@3214.86,2482
  other v4: 3214.27,2457.5
HRVLD1: P3.16 R33.4 R34.6 | length 1029.9
  Mid-Layer 2 w6: v4@3177.34,2667.86 3394.95,2667.86 3465.18,2597.63 v4(3465.18,2545.13)
  Bottom Layer w6: P3.16@2762,2833 2902.56,2692.44 3153.4,2692.44 v4(3177.34,2668.5) 3177.34,2640.7 3214.86,2603.18 R34.6@3214.86,2544.99 ; R33.4@3427.33,2544.99 3465.05,2544.99 v4(3465.18,2545.13)
HTACK: R33.7 R35.2 U2.55 | length 2336.4
  Top Layer w6: v4(1862,1948) 1862,1920 1915,1867 1942,1867 2084.26,1724.74 U2.55@2139.82,1724.74
  Bottom Layer w6: v4(1862,1948) 1862,2196 2026,2360 3340,2360 3362,2382 v4(3362,2455) 3362,2481.19 R33.7@3361.19,2482 ; v4@3364.25,2457.19 R33.7@3364.25,2481.5
HTACK1: P3.14 R32.4 R35.7 | length 805.6
  Top Layer w6: P3.14@2862,2833 2862,2673 2990.01,2544.99 v4(3138,2544.99) R32.4@3180.21,2544.99 ; v4(3327,2587.05) 3347.05,2587.05 3361.19,2572.91 R35.7@3361.19,2544.99
  Mid-Layer 2 w6: v4(3138,2544.99) 3232.48,2544.99 3274.54,2587.05 v4(3327,2587.05)
HTCLK: R33.8 R35.1 U2.56 | length 2338.8
  Top Layer w6: v4(1814,1920) 1893.5,1840.5 1954.5,1840.5 2086.01,1708.99 U2.56@2139.82,1708.99
  Bottom Layer w6: v4(1814,1920) 1814,2220 2007,2413 3311.65,2413 3326,2427.35 v4(3326,2455)
HTCLK1: C1.2 P3.2 R32.1 R35.8 | length 455.9
  Top Layer w6: R35.8@3326.54,2544.99 R32.1@3281,2544.99 3281,2652 3378.43,2749.43 C1.2@3461.34,2749.43 ; C1.2@3461.23,2750.77 3461.23,2832.23 cw(c3462,2832.23) P3.2@3462,2833
HTRDY: R32.5 R34.4 U2.18 | length 1748.7
  Top Layer w6: U2.18@2456.18,1520.02 3148.02,1520.02 3278.61,1650.61 3278.61,2201.39 3180.21,2299.79 R32.5@3180.21,2482
  other v4: 3179.61,2457.5
HTRDY1: P3.6 R33.2 R34.5 | length 575.7
  Mid-Layer 2 w6: v4(3180,2590) 3230.7,2640.7 v4(3360.51,2640.7)
  Bottom Layer w6: v4(3180,2590) 3180.21,2589.79 R34.5@3180.21,2544.99 ; P3.6@3262,2833 3361.19,2733.81 R33.2@3361.19,2544.99
HTREQ: R33.6 R35.3 U2.54 | length 2245
  Top Layer w6: v4(1914,1909) 2082.51,1740.49 U2.54@2139.82,1740.49
  Bottom Layer w6: v4(1914,1909) 1914,2191 2051,2328 3355,2328 3392.68,2365.68 R33.6@3392.68,2482
  other v4: 3394,2455
HTREQ1: P3.4 R32.2 R35.6 | length 545.9
  Top Layer w6: R32.2@3246.35,2544.99 3246.35,2600.3 v4(3256.41,2610.36) 3256.41,2682.98 3362,2788.58 P3.4@3362,2833 ; v4(3391.38,2610.22) 3392.68,2608.92 R35.6@3392.68,2544.99
  Mid-Layer 2 w6: v4@3247.29,2610.46 3391.15,2610.46 v4(3391.38,2610.22)
HTVLD: R33.5 R35.4 U2.52 | length 2180.5
  Top Layer w6: v4(1946,1940) 2002.36,1883.64 2013.64,1883.64 2125.3,1771.98 U2.52@2139.82,1771.98
  Bottom Layer w6: v4(1946,1940) 1946,2171 2067,2292 3367,2292 3427.33,2352.33 R33.5@3427.33,2482
  other v4: 3429,2455
HTVLD1: P3.8 R32.3 R35.5 | length 822.2
  Top Layer w6: P3.8@3162,2833 3214.86,2780.14 3214.86,2710.86 ; R32.3@3214.86,2544.99 3214.86,2710.86 ; 3215,2711 3214.86,2710.86 ; R35.5@3427.33,2544.99 3450.39,2568.06 v4(3450.39,2663)
  Mid-Layer 2 w6: P3.8@3162,2833 3251,2744 3413.39,2744 3450.39,2707 v4(3450.39,2663)
LED0: D3.2 U2.49 | length 1952.7
  Top Layer w6: D3.2@483.08,2306 v4(518,2306) ; v4(2122,1925) 2203.51,1843.49 U2.49@2203.51,1802.78
  Mid-Layer 2 w6: v4(518,2306) 841,1983 1961,1983 2019,1925 v4(2122,1925)
LED1: D4.2 U2.45 | length 2109.7
  Top Layer w6: D4.2@483.08,2458 515,2458 v4(517,2456) ; v4(2208,1955) 2208,1913.3 2266.5,1854.8 U2.45@2266.5,1802.78
  Mid-Layer 2 w6: v4(517,2456) 974,1999 1975,1999 2019,1955 v4(2208,1955)
LED2: D5.2 U2.47 | length 2147.9
  Top Layer w6: D5.2@483.08,2610 517,2610 v4(519,2608) ; v4(2159,1984) 2159,1935.43 2235.01,1859.43 U2.47@2235.01,1802.78
  Mid-Layer 2 w6: v4(519,2608) 520,2608 1114,2014 1992,2014 2022,1984 v4(2159,1984)
MISO: JP1.5 R1.2 | length 2034.5
  Mid-Layer 2 w6: v4(3132,1823) 3132,485 3194,423 JP1.5@3318,423
  Bottom Layer w6: R1.2@2647.63,1824 3131,1824 v4(3132,1823)
MISO1: U2.60 U9.2 | length 1390.5
  Top Layer w6: U9.2@937,1943 1007,1943 1040,1910 1040,1827 1109,1758 ; 1125,1758 1109,1758 ; U2.60@2139.82,1646 2075,1646 1963,1758 1109,1758
MOSI: JP1.7 R30.6 | length 3212.6
  Mid-Layer 2 w6: v4(3130,2205) 3130,1952 3095,1917 3095,428 3200,323 JP1.7@3318,323
  Bottom Layer w6: R30.6@2051.5,2107.5 2051.5,2168.5 2088,2205 v4(3130,2205)
MOSI1: U2.59 U9.5 | length 1007.9
  Top Layer w6: U9.5@1207,1843 1332,1843 1403,1772 1968,1772 2078.25,1661.75 U2.59@2139.82,1661.75
NetC5_2: C5.2 P4.2 | length 175.9
  Top Layer w6.07: P4.2@1444,1570 1481.5,1607.5 cw(c1496,1592.99) 1496,1613.5 1566.54,1613.5 cw(c1566.54,1601.54) 1575,1610 C5.2@1594,1591
NetC18_2: C18.2 C23.2 L4.2 L5.1 R16.1 | length 427.9
  Top Layer w10: R16.1@377,1240 C18.2@478,1240
  Top Layer w25: C23.2@369.19,1300 372,1297.19 R16.1@372,1235 R16.1@377,1240 ; L5.1@459,1338 469,1328 469,1249 C18.2@478,1240 478,1137.16 L4.2@523,1137.16
NetC23_1: C23.1 R16.2 R17.2 U3.5 | length 270
  Top Layer w10: R17.2@235.63,1235 R16.2@311.37,1235 ; U3.5@304,1110 304,1227.63 R16.2@311.37,1235 ; C23.1@314.19,1300 314.19,1237.82 R16.2@311.37,1235
NetC34_1: C34.1 R19.2 R20.2 U5.5 | length 276
  Top Layer w10: R20.2@249.63,1863 R19.2@314.37,1863 ; U5.5@303,1733 303,1851.63 R19.2@314.37,1863 ; C34.1@318,1938 318,1866.63 R19.2@314.37,1863
NetC34_2: C34.2 C36.2 L6.2 L7.1 R19.1 | length 497.8
  Top Layer w10: C34.2@373,1938 375,1936 R19.1@375,1863 514,1863 C36.2@526,1875
  Top Layer w20: L6.2@526,1769.16 L6.2@572,1769.16
  Top Layer w30: L7.1@508.58,1982 508.58,1892.42 C36.2@526,1875 L6.2@526,1769.16
NetC53_2: C53.2 P4.1 | length 177
  Top Layer w6.07: P4.1@1444,1670 1484.79,1629.21 ccw(c1496,1640.44) 1496,1624.57 1566.65,1624.57 ccw(c1566.65,1636.28) 1574.92,1628 C53.2@1594,1647.08
NetC75_1: C75.1 C79.1 F2.1 J3.1 | length 784.9
  Top Layer w30: F2.1@1790,551 1790,643 C75.1@1794,647 1794,722 1775,741 C79.1@1782,741 ; v5(1848,740) v5@1822,740 ; C79.1@1782,741 1821,741 v5@1822,740 ; C79.1@1782,741 1782,740 v5(1818,740) v5@1822,740
  Mid-Layer 2 w30: v5(1818,740) 1958,740 2151,547 J3.1@2209,547
NetC80_2: C80.2 J3.8 | length 748
  Top Layer w8.22: C80.2@2243.9,1341.31 ccw(c2268.37,1316.84) 2233.76,1316.84 2233.76,681 ccw(c2331.89,681) 2262.5,611.61 J3.8@2268.06,606.06
NetC81_2: C81.2 J3.9 | length 746.6
  Top Layer w8.22: J3.9@2189.31,606.06 2191.25,607.99 ccw(c2120.54,678.7) 2220.54,678.7 2220.54,1316.84 ccw(c2185.92,1316.84) C81.2@2210.4,1341.31
NetD2_1: D2.1 R10.1 | length 112.1
  Top Layer w10: D2.1@173.47,781.57 173.47,676.57 R10.1@178.47,671.57
NetD3_1: D3.1 R62.1 | length 160
  Top Layer w10: R62.1@253,2306 D3.1@413,2306
NetD4_1: D4.1 R63.1 | length 160
  Top Layer w10: R63.1@253,2458 D4.1@413,2458
NetD5_1: D5.1 R64.1 | length 160
  Top Layer w10: R64.1@253,2610 D5.1@413,2610
NetF1_1: F1.1 P1.A4 P1.B4 P2.1 P6.1 | length 1995.5
  Top Layer w22: 1263.99,363.95 1273.22,354.72 P1.A4@1273.22,298.38 ; P1.B4@1466.14,298.38 1466.14,376.22
  Top Layer w30: P2.1@584,525.76 P2.1@604,525.76 P2.1@624,525.76 P2.1@644,525.76
  Top Layer w50: P2.1@604,525.76 604,527.03 640.71,563.74 713.71,563.74 ; P2.1@644,525.76 P2.1@664,525.76 675.73,525.76 713.71,563.74 ; 1263.06,376.09 1263.06,556.5 ; 1263.06,581.89 1263.06,560.18 ; 1478.27,382.62 1478.27,561.91 1442.72,597.46 1300.34,597.46 ; 713.71,563.74 804.22,654.25 804.22,784.81 F1.1@802.05,786.97 P6.1@919.2,786.97 920.94,785.23 920.94,700.11 1023.59,597.46 1222.1,597.46 ; 1222.1,597.46 1250.37,569.19 1263.06,556.5 ; 1222.1,597.46 1263.06,597.46 1300.34,597.46 ; 1263.06,556.5 1263.06,560.18 ; 1263.06,560.18 1300.34,597.46
NetL4_1: L4.1 U3.3 | length 144.2
  Top Layer w25: U3.3@380.8,1010 L4.1@525,1010
NetL6_1: L6.1 U5.3 | length 197.9
  Top Layer w20: U5.3@377.8,1633 386.8,1642 L6.1@572,1642
NetP1_A5: P1.A5 R4.1 | length 104
  Top Layer w10: P1.A5@1320.47,298.38 1320.47,377.9 1323.04,380.48 1323.04,381.46 1336.35,394.77 R4.1@1337.34,394.77
NetP1_B5: P1.B5 R3.1 | length 111.1
  Top Layer w10: R3.1@1404.55,394.77 1405.54,394.77 1438.58,361.73 P1.B5@1438.58,298.38
PB11: R30.1 R31.8 U2.48 | length 283.8
  Top Layer w6: R31.8@2117.65,2044.5 2117.65,1963.35 2219.26,1861.74 U2.48@2219.26,1802.78
  other v4: 2119,2019
PB12: R30.2 R31.7 U2.50 | length 285.1
  Top Layer w6: R31.7@2083,2044.5 2083,1930 2187.76,1825.24 U2.50@2187.76,1802.78
  other v4: 2083,2019
PB13: R30.3 R31.6 U2.51 | length 291.6
  Top Layer w6: R31.6@2051.5,2044.5 2051.5,1940.5 2172.02,1819.98 U2.51@2172.02,1802.78
  other v4: 2051.5,2019
PB14: R1.1 R2.1 U2.31 | length 209.6
  Top Layer w6: U2.31@2456.18,1724.74 2528.74,1724.74 2549,1745 2549,1812 v4@2561,1824
  Bottom Layer w6: v4(2563,1823) 2586,1823 R1.1@2587,1824
PB15: R21.1 R22.1 U2.30 | length 176
  Top Layer w6: U2.30@2456.18,1708.99 2552.99,1708.99 2565,1721 R22.1@2587,1743
  Bottom Layer w6: v4@2565,1721 R21.1@2587,1743
  other v4: 2566,1723
POW: C3.2 C7.1 C22.2 C24.1 C25.2 C33.2 F1.2 F2.2 JP1.4 P3.1 P3.3 U3.1 U3.4 U5.1 U5.4 | length 9439.4
  Top Layer w25: C33.2@186,1648 288,1648 290.5,1645.5 300.5,1645.5 303,1643 U5.1@303,1633 ; C22.2@213,1011 258,1056 288,1056 ; U5.1@303,1648 303,1658.2 U5.4@377.8,1733 ; U3.1@304,1010 304,1040 ; 317,1055 304,1042 ; U3.4@378.8,1110 324.8,1056 307,1056 ; 288,1056 304,1040 ; 288,1056 307,1056 ; 304,1040 304,1042 ; 304,1042 304,1053 307,1056
  Top Layer w30: C33.2@186,1648 134,1648 99,1613 99,1030 118,1011 C22.2@211,1011 ; C22.2@213,1011 C22.2@211,1011 ; v3(1719.47,476.77) 1719.92,477.22 F2.2@1719.92,551 1712.09,543.17 1712.09,551 1613.76,551 1260.05,904.71 763.11,904.71 731.97,873.57 F1.2@731.97,786.97 724.76,779.76 655.53,779.76 C25.2@651.11,784.18 542.77,784.18 C24.1@542.48,783.89 542.19,784.18 402.67,784.18 C3.2@397.96,788.89 397.96,866.28 380.39,883.85 255.29,883.85 211,928.14 C22.2@211,1011 ; v3(3189.67,204.54) 3190.27,205.14 v3(3224.9,205.14) 3243.77,205.14 3311.92,136.98 3517.54,136.98 3593.7,213.15 3593.7,2852.52 3559.59,2886.63 C7.1@3559.59,2930.96 ccw(c3554.68,2926.05) C7.1@3558.3,2931.98 ; P3.3@3362,2933 3363.02,2931.98 C7.1@3558.3,2931.98 ; P3.1@3462,2933 3554.68,2933 cw(c3554.68,2926.05) C7.1@3558.3,2931.98
  Mid-Layer 2 w30: v3(1719.77,510.35) 1719.77,476.77 1719.77,377.53 1893.3,204 2542.72,204 2735.64,396.92 2996.75,396.92 3189.13,204.54 v3(3189.67,204.54) ; v3@3189.67,204 3224.9,204 3478,204 3545,271 3545,476 3498,523 JP1.4@3418,523
RST#: JP1.8 R5.1 R21.2 | length 2355.5
  Top Layer w6: JP1.8@3418,323 3418,221.09 ccw(c3419.95,221.09) R5.1@3419.95,219.14
  Bottom Layer w6: R21.2@2647.63,1743 2647.63,1478.37 2846,1280 3476.89,1280 3539,1217.89 3539,373 3489,323 JP1.8@3418,323
RXD: J1.1 U2.13 | length 1212.2
  Top Layer w6: U2.13@2360.99,1489.22 2360.99,1464.44 2440.44,1385 v4(2527,1385)
  Bottom Layer w6: v4(2527,1385) 2760,1152 J1.1@3419,1152
SCK: JP1.3 R30.7 | length 2919.1
  Mid-Layer 2 w6: v4(3162.5,2175) 3162.5,557.5 3197,523 JP1.3@3318,523
  Bottom Layer w6: R30.7@2083,2107.5 2083,2149 2109,2175 v4(3162.5,2175)
SCK1: U2.58 U9.6 | length 1022.1
  Top Layer w6: U9.6@1207,1893 1330,1893 1440,1783 1974,1783 2079.5,1677.5 U2.58@2139.82,1677.5
SCS: JP1.1 R30.8 | length 2714.5
  Mid-Layer 2 w6: v4(3195,2145) 3195,690 3262,623 JP1.1@3318,623
  Bottom Layer w6: R30.8@2117.65,2107.5 2117.65,2134.65 2128,2145 v4(3195,2145)
SCS1#: U2.57 U9.1 | length 1413.4
  Top Layer w6: U9.1@934,1993 1022.11,1993 1122.8,2093.68 1403.32,2093.68 1701,1796 1977,1796 2079.76,1693.24 U2.57@2139.82,1693.24
SSRX_N: J3.5 U2.8 | length 959.6
  Top Layer w8.22: U2.8@2282.25,1489.22 2282.25,1469 2280.99,1467.74 2280.99,1460 ccw(c2295.44,1460) 2285.22,1449.78 2290.41,1444.59 cw(c2249.81,1404) 2307.22,1404 2307.22,1395.2 ccw(c2407.22,1395.2) 2336.51,1324.49 2351.22,1309.78 2438.35,1222.65 cw(c2358.3,1142.59) 2471.52,1142.59 2471.52,680.24 ccw(c2571.52,680.24) 2500.81,609.53 J3.5@2504.28,606.06
SSRX_P: J3.6 U2.7 | length 959.6
  Top Layer w8.22: U2.7@2266.5,1489.22 2266.5,1469 2267.77,1467.74 2267.77,1460 ccw(c2295.44,1460) 2275.87,1440.43 2281.06,1435.25 cw(c2249.81,1404) 2294,1404 2294,1395.2 ccw(c2407.22,1395.2) 2327.16,1315.14 2429.01,1213.3 cw(c2358.3,1142.59) 2458.3,1142.59 2458.3,680.24 cw(c2358.3,680.24) 2429.01,609.53 J3.6@2425.54,606.06
SSTX_N: C80.1 U2.5 | length 115.5
  Top Layer w8.22: U2.5@2235.01,1489.22 2235.01,1471.09 cw(c2230.69,1471.09) 2233.74,1468.04 2233.74,1401.26 ccw(c2268.42,1401.26) C80.1@2243.9,1376.74
SSTX_P: C81.1 U2.4 | length 115.5
  Top Layer w8.22: C81.1@2210.4,1376.74 ccw(c2185.97,1401.18) 2220.52,1401.18 2220.52,1468.04 cw(c2223.58,1471.09) 2219.26,1471.09 U2.4@2219.26,1489.22
TXD: J1.2 U2.12 | length 1268
  Top Layer w6: U2.12@2345.24,1489.22 2345.24,1466.76 2455,1357 v4(2503,1357)
  Bottom Layer w6: v4(2503,1357) 2808,1052 J1.2@3419,1052
UD_N: J3.2 U2.2 | length 1779.3
  Top Layer w8.22: U2.2@2187.76,1489.22 2187.76,1471.09 cw(c2183.45,1471.09) 2186.5,1468.04 2186.5,1467.7 cw(c2159.47,1467.7) 2178.58,1448.59 2172.49,1442.49 1971.29,1241.29 ccw(c2042,1170.58) 1942,1170.58 1942,446.18 ccw(c2034.18,446.18) 1969,381 1989.71,360.29 ccw(c2060.42,431) 2060.42,331 2232.58,331 ccw(c2232.58,431) 2303.29,360.29 2322,379 ccw(c2278.1,422.9) 2340.19,422.9 2340.19,479 ccw(c2255.11,479) 2315.27,539.16 J3.2@2307.43,547
UD_P: J3.3 U2.1 | length 1820.9
  Top Layer w8.22: U2.1@2172.02,1489.22 2172.02,1471.09 ccw(c2176.33,1471.09) 2173.28,1468.04 2173.28,1467.7 cw(c2159.47,1467.7) 2169.23,1457.93 2163.14,1451.84 1961.94,1250.64 ccw(c2042,1170.58) 1928.78,1170.58 1928.78,446.18 ccw(c2034.18,446.18) 1959.65,371.66 1980.36,350.94 ccw(c2060.42,431) 2060.42,317.78 2232.58,317.78 ccw(c2232.58,431) 2312.64,350.94 2331.35,369.65 ccw(c2278.1,422.9) 2353.41,422.9 2353.41,479 cw(c2438.48,479) 2378.32,539.16 J3.3@2386.17,547
pads on no net: P1.0 P1.A6 P1.A7 P1.A8 P1.B6 P1.B7 P1.B8 R30.4 R30.5 R31.4 R31.5

## Polygon pours and split planes (outlines as drawn)
GND on Mid-Layer 1 "GND" (hatched 90Degree grid 8 track 8, remove dead copper, pour order 4): -29,-10 3685,-10 3697,2 3697,3168 -10,3168
GND on Mid-Layer 2 "GND" (hatched 90Degree grid 8 track 8, remove dead copper, pour order 6): -35,-23 -22,-10 3697,-10 3697,3193 3691,3199 3666,3174 -16,3174
GND on Top Layer "GND" (hatched 90Degree grid 8 track 8, remove dead copper, pour order 2): -37,-10 3692,-10 3692,3177 3678,3191 3671,3184 -3,3184
GND on Bottom Layer "GND" (hatched 90Degree grid 8 track 8, remove dead copper, pour order 8): -10,-29 3698,-29 3710,-17 3722,-5 3722,3174 -66,3174

## Keep-outs
Keep-Out Layer:
  the board outline again, w8

## Other copper
Top Layer:
  rectangle net GND: 3482.81,2705.79 3528.6,2783.64
  rectangle net 1V2: 615,2046 689,2120
  pour cut-out: 3445.11,2772.05 3476.29,2771.88 3476.29,2720.13 3444.97,2719.91
  pour cut-out: 1404,1706 1483,1706 1483,1529 1404,1529
  pour cut-out: 476,2023 614,2023 614,1941 473,1941
  pour cut-out: 420,1378 566,1378 566,1297 419,1297
  pour cut-out: 424,1173 620,1173 620,973 421.09,973
  pour cut-out: 475,1805 475,1804 669,1804 669,1606 474,1606
  pour cut-out: 2173,1767 2173,1524 2420,1524 2420,1770
  pour cut-out: 3160.61,2568.5 3160.61,2458.5 3446.94,2458.5 3446.94,2568.5
Mid-Layer 1:
  rectangle net GND: 467.81,231.69 765.21,368.88
  rectangle net GND: 759.25,277.7 875.14,551.25
  rectangle net GND: 2169,1498 2435,1779
  pour cut-out: 3075.77,2769.56 3048.5,2769.56 3048.5,2737.3 3075.85,2737.3
  pour cut-out: 3446.23,2766.26 3473.5,2766.26 3473.5,2734 3446.15,2734
  pour cut-out: 1404,1706 1483,1706 1483,1529 1404,1529
  pour cut-out: 1565,1674 1565,1561 1677,1561 1677,1674
Mid-Layer 2:
  rectangle net GND: 764.45,276.85 882.81,558.91
  rectangle net GND: 478.04,241.02 770.32,346.73
  rectangle net GND: 2246,1525 2417,1613
  rectangle net GND: 2166,1551 2422,1762
  pour cut-out: 3075.77,2769.56 3048.5,2769.56 3048.5,2737.3 3075.85,2737.3
  pour cut-out: 3446.23,2766.26 3473.5,2766.26 3473.5,2734 3446.15,2734
Bottom Layer:
  rectangle net GND: 3003.55,2727.58 3039,2781.18
  rectangle net GND: 2163,1540 2427,1777
  pour cut-out: 3078.12,2775.66 3046.94,2775.49 3046.94,2723.74 3078.25,2723.52
  pour cut-out: 3160.61,2568.5 3160.61,2458.5 3446.94,2458.5 3446.94,2568.5

## Silkscreen, mask and mechanical layers (free items; w line width, h text height)
Top Overlay:
  drawing of 3663 lines, arcs and shapes, not listed
  text "HD30" at 1078.83,3002 h35 r90
  text "HD28" at 1178.92,3002 h35 r90
  text "HD26" at 1279.01,3002 h35 r90
  text "HD24" at 1379.1,3002 h35 r90
  text "HD22" at 1479.19,3002 h35 r90
  text "HD20" at 1579.28,3002 h35 r90
  text "HD18" at 1679.37,3002 h35 r90
  text "HD16" at 1779.46,3002 h35 r90
  text "HD14" at 1879.55,3002 h35 r90
  text "HD12" at 1979.64,3002 h35 r90
  text "HD10" at 2079.73,3002 h35 r90
  text "HD8" at 2179.83,3002 h35 r90
  text "HD6" at 2279.92,3002 h35 r90
  text "HD4" at 2380.01,3002 h35 r90
  text "HD2" at 2480.1,3002 h35 r90
  text "HD0" at 2580.19,3002 h35 r90
  text "GND" at 2680.28,3002 h35 r90
  text "GND" at 2780.37,3002 h35 r90
  text "GND" at 2880.46,3002 h35 r90
  text "GND" at 2980.55,3002 h35 r90
  text "GND" at 3080.64,3002 h35 r90
  text "GND" at 3180.73,3002 h35 r90
  text "GND" at 3280.82,3002 h35 r90
  text "VIO" at 3380.91,3002 h35 r90
  text "VIO" at 3481,3002 h35 r90
  text "CH569W-R0-1v0" at 228.1,2781.07 h35
  text "HD1" at 2580.19,2683.97 h35 r90
  text "HD9" at 2179.83,2672.3 h35 r90
  text "HD7" at 2279.92,2672.3 h35 r90
  text "HD5" at 2380.01,2672.3 h35 r90
  text "HD3" at 2480.1,2672.3 h35 r90
  text "GND" at 2680.28,2672.3 h35 r90
  text "HD11" at 2079.73,2654.81 h35 r90
  text "HD31" at 1078.83,2648.98 h35 r90
  text "HD21" at 1579.28,2648.98 h35 r90
  text "HD19" at 1679.37,2643.15 h35 r90
  text "HD17" at 1779.46,2643.15 h35 r90
  text "HD15" at 1879.55,2643.15 h35 r90
  text "HD13" at 1979.64,2643.15 h35 r90
  text "HD29" at 1178.92,2637.31 h35 r90
  text "HD27" at 1279.01,2637.31 h35 r90
  text "HD25" at 1379.1,2637.31 h35 r90
  text "HD23" at 1479.19,2637.31 h35 r90
  text "LED2" at 556.34,2594.94 h35
  text "HRVLD1" at 2780.37,2579 h35 r90
  text "HTACK1" at 2880.46,2579 h35 r90
  text "HRACK1" at 2980.55,2579 h35 r90
  text "HRCLK1" at 3080.64,2579 h35 r90
  text "HTVLD1" at 3180.73,2579 h35 r90
  text "HTRDY1" at 3280.82,2579 h35 r90
  text "HTREQ1" at 3380.91,2579 h35 r90
  text "HTCLK1" at 3503.12,2524.88 h35 r90
  text "LED1" at 556.34,2441.3 h35
  text "LED0" at 556.34,2287.65 h35
  text "GXM" at 1272,1655 h35
  text "GXP" at 1276,1552 h35
  text "RXD" at 3485,1134 h35
  text "TXD" at 3483,1035 h35
  text "GND" at 3488,935 h35
  text "GND" at 980.87,859.73 h35
  text "5V" at 878.37,857.55 h35
  text "(1A)" at 704.07,840.03 h50
  text "3V3" at 3486,833 h35
  text "3V3" at 3493,606 h35
  text "SCS" at 3149,605 h35
  text "供电" at 1269.98,562.98 h120
  text "POW" at 3492,506 h35
  text "SCK" at 3148,505 h35
  text "MISO" at 3129,408 h35
  text "GND" at 3485,406 h35
  text "MOSI" at 3131,308 h35
  text "RST#" at 3489,300 h35
  text "5V" at 319.72,90.87 h60
Bottom Overlay:
  text "BOOT" at 2583.01,3120.79 h32 r90
  text "GND" at 2681.76,3108.77 h32 r90
Mechanical 1:
  the board outline again, w8